# Altium PCB Sem 2 Lab Project - Simple Voice Recorder - Finalized Doc.PcbDoc
Units mm, origin at the board's own origin, x right, y up, seen from the top; angles counter-clockwise.
Board outline 92.5 x 147.5 mm, 2 copper layers (Top Layer, Bottom Layer); 23 components, 24 nets, 113 pads, 3 vias.
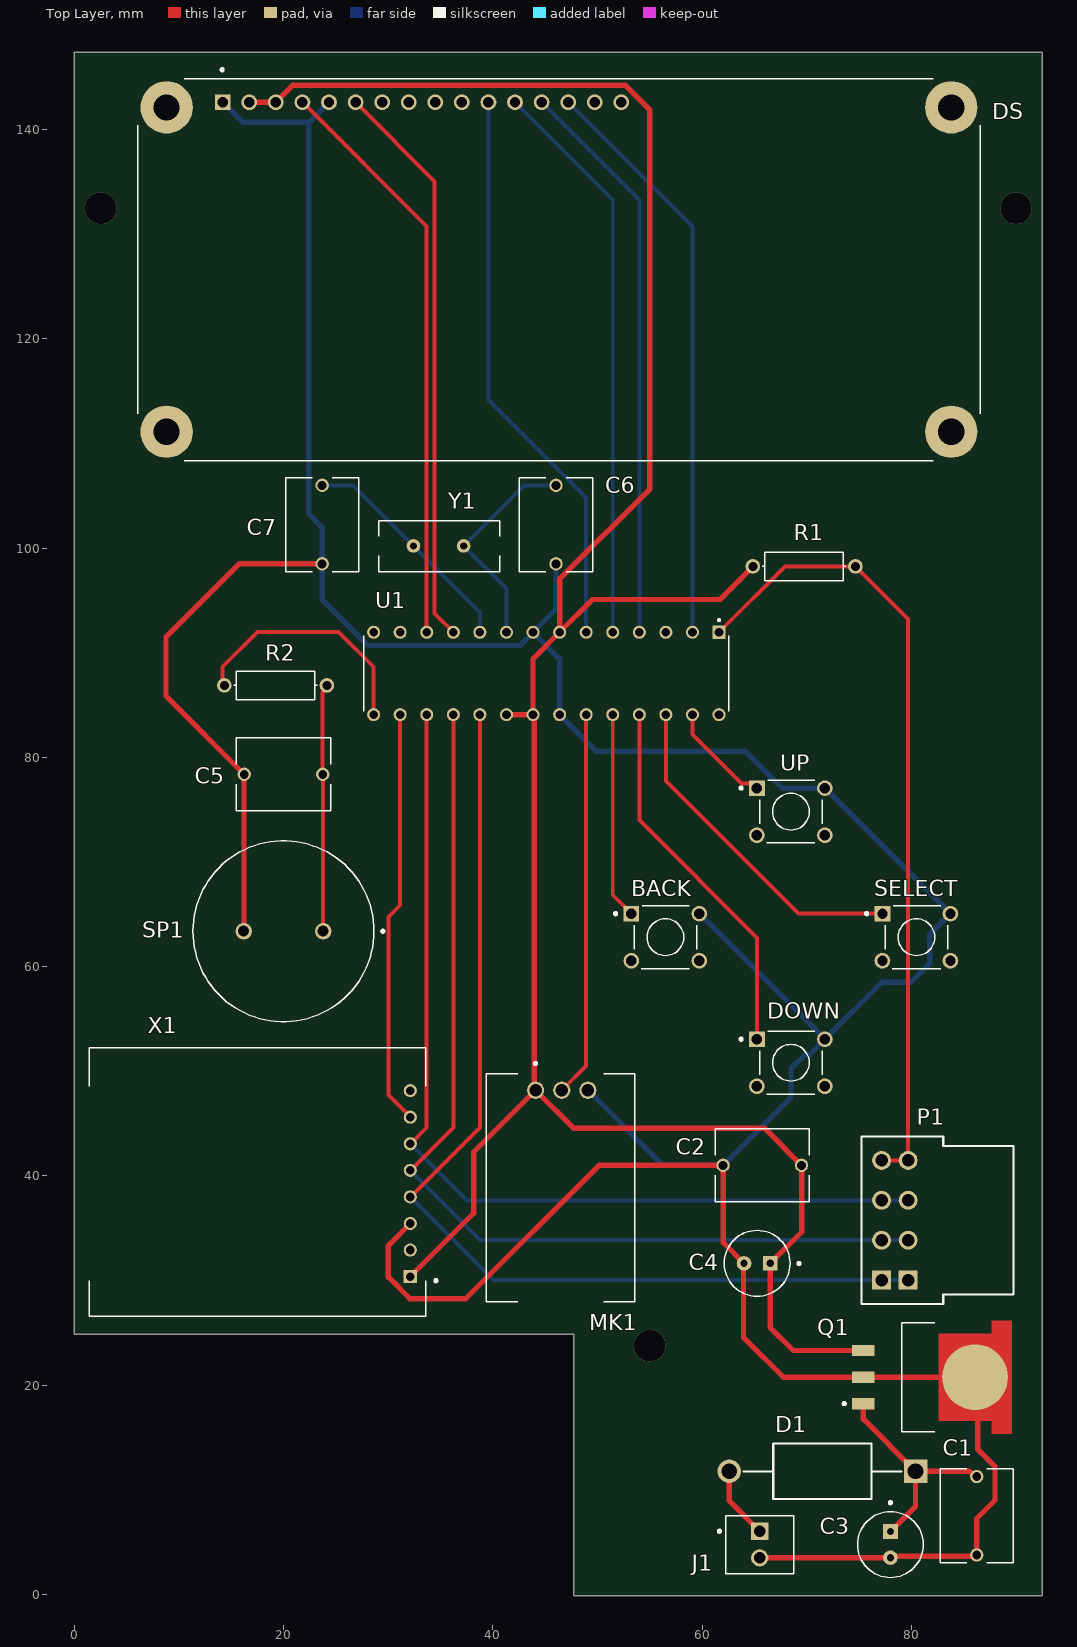
[diagram p0: Top Layer view]
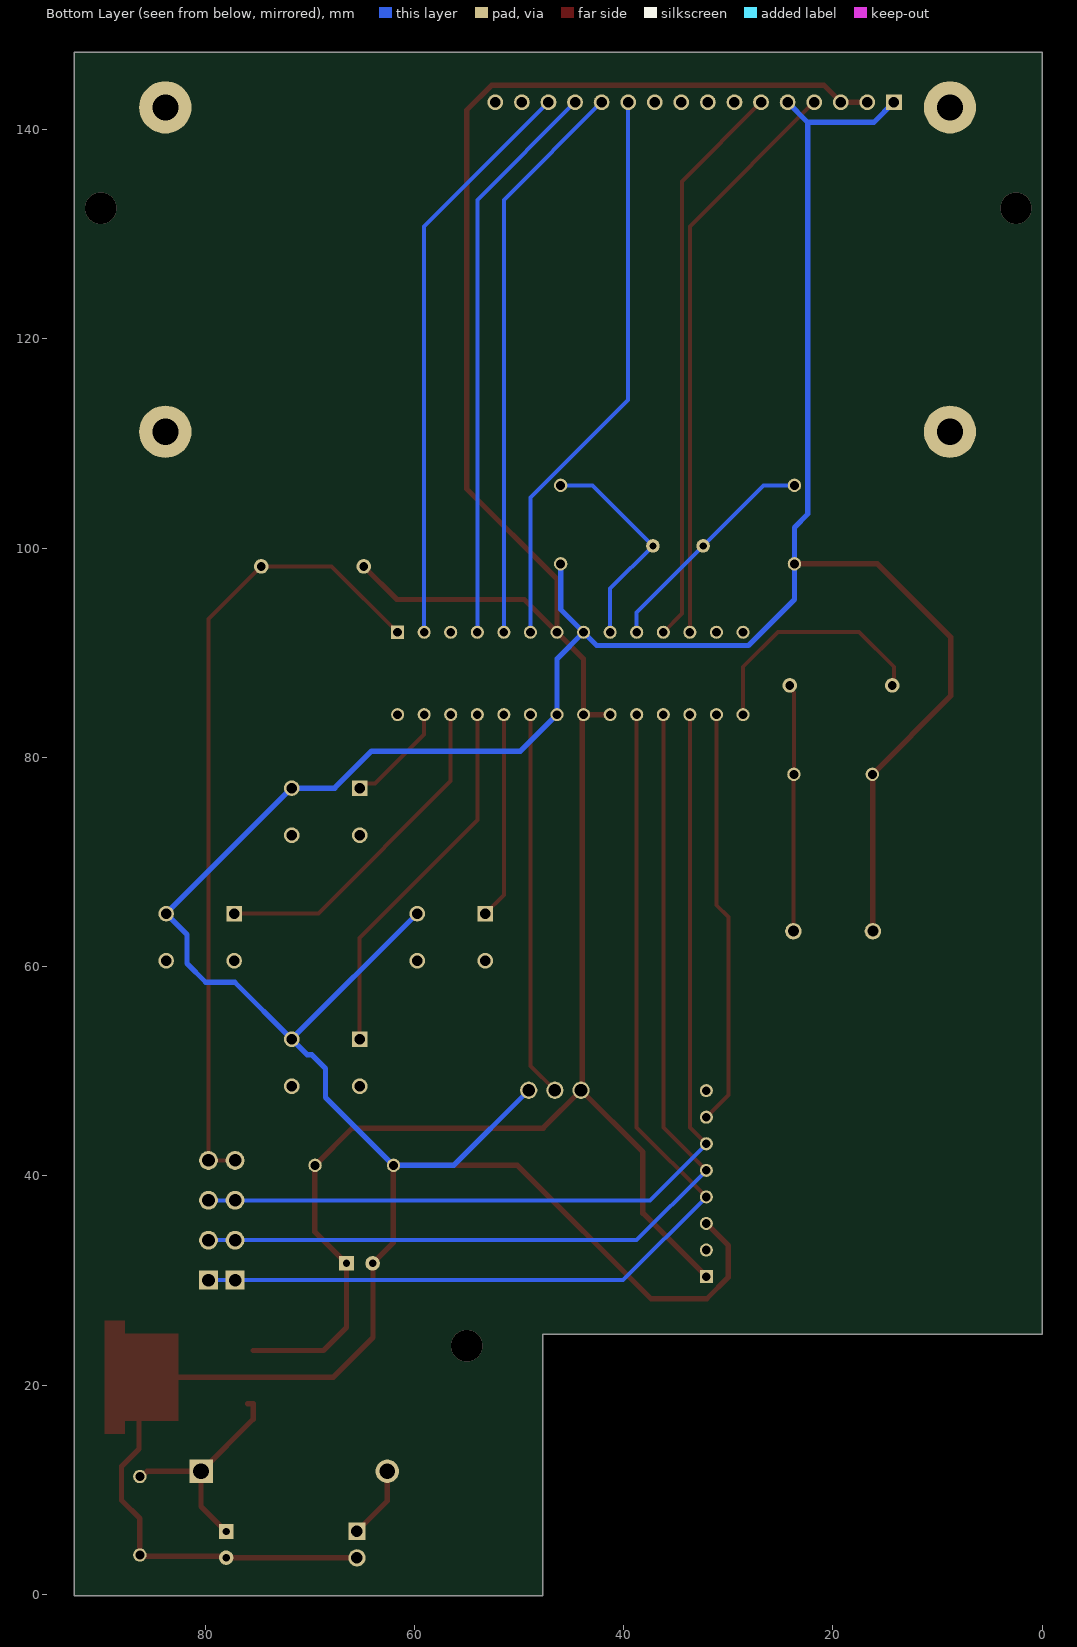
[diagram p1: Bottom Layer view, seen from below]
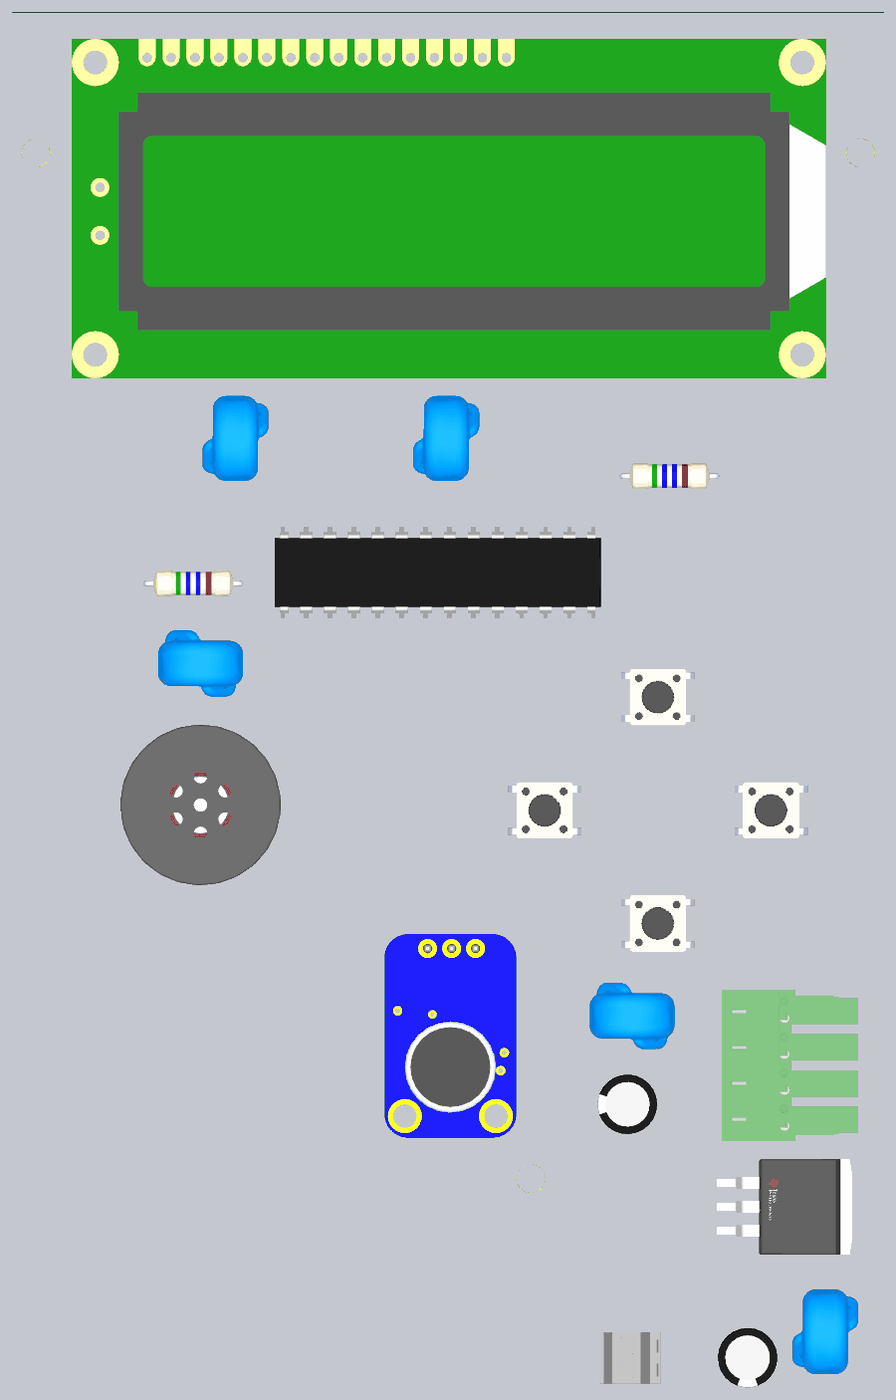
[diagram p2: 3D render of the assembled board from above, using the file's embedded part models]

## Layer stack, top to bottom
Top Solder: solder mask 0.0102, Solder Resist, Dk 3.5
Top Layer: signal copper 0.0356
Dielectric 1: dielectric 0.32, FR-4, Dk 4.8
Bottom Layer: signal copper 0.0356
Bottom Solder: solder mask 0.0102, Solder Resist, Dk 3.5

## Board outline
47.729,-0.124 47.729,24.876 0,24.876 0,147.376 92.5,147.376 92.5,-0.124

## Design rules (kind name [scope] priority, off if disabled: settings)
Clearance [All] p1: gap=0.381 ignorepadtopadclearanceinfootprint=FALSE except(0.508: Arc-Hole Track-Hole SMDPad-Hole THPad-Hole Via-Hole Fill-Hole Poly-Hole Region-Hole Text-Hole)
PolygonConnect [All] p1: connectstyle=Relief reliefconductorwidth=0.254 reliefentries=4 polygonreliefangle="90 Angle" airgapwidth=0.254
RoutingVias [All] p1: holewidth=0.711 width=1.27 viastyle="Through Hole" minholewidth=0.711 minwidth=1.27 maxholewidth=0.711 maxwidth=1.27
SilkToSolderMaskClearance [IsPad] p1: minsilkscreentomaskgap=0.127 clearancetoexposedcopper=TRUE
SolderMaskExpansion [All] p1: expansion=0.102 istentingtop=FALSE
Width Width_1 [InNet('+5V0') or InNet('GND') or InNet('NetC1_2') or InNet('VCC')] p1: maxlimit=0.635 minlimit=0.381 preferedwidth=0.508
Width [All] p2: maxlimit=0.508 minlimit=0.254 preferedwidth=0.381
29 further rules are at their usual default settings.

## Components (designator, comment, footprint, x,y, rotation, side; value= is the part's Value field where it differs from the comment)
BACK "Push Button" 1825910-6 56.472,62.806 r0 top
C1 "0.1 uF" DE6E3KJ222MN3A 86.25,7.5 r90 top
C2 "0.1 uF" DE6E3KJ222MN3A 65.75,41 r0 top
C3 "0.22 uF" CAPPRD500W60D1000H1600-V-000-300 78,4.75 r270 top
C4 "10 uF" CAPPRD500W60D1000H1600-V-000-300 65.252,31.626 r180 top
C5 "0.22 uF" DE6E3KJ222MN3A 19.979,78.376 r0 top
C6 "22 pF" DE6E3KJ222MN3A 46.029,102.244 r90 top
C7 "22 pF" DE6E3KJ222MN3A 23.679,102.244 r90 top
D1 "1N5822" 1N5822 71.5,11.75 r180 top
DOWN "Push Button" 1825910-6 68.472,50.806 r0 top
DS "RC1602B-BIW-CSV" RC1602B-BIW-CSV 46.311,126.622 r0 top
J1 "1546215-2" 1546215-2 65.5,4.75 r270 top
MK1 "Microphone" "Adafruit Max4466" 46.479,38.876 r270 top
P1 "691309310004" 691309310004 82.5,35.75 r90 top
Q1 "LM7805CT/NOPB" LM7805SX/NOPB 80.75,20.75 r90 top
R1 "10K" RESAD800W55L650D230-100-300_SEI_CF14_CFM12 69.75,98.25 r270 top
R2 "150 Ohm" RESAD800W55L650D230-100-300_SEI_CF14_CFM12 19.229,86.876 r270 top
SELECT "Push Button" 1825910-6 80.472,62.806 r0 top
SP1 "Speaker" AST-01708MR-R 19.979,63.376 r180 top
U1 "ATMEGA328-PU" ATMEGA328-PU 45.104,88.018 r270 top
UP "Push Button" 1825910-6 68.472,74.806 r0 top
X1 "MSDBB" "Micro SD Card Breakout Board" 17.75,39.25 r0 top
Y1 "830003240B" 830003240B 34.804,100.206 r270 top

## Footprints (in the part's own frame and the unit in brackets; to place one, negate y for a bottom-side part, rotate by r counter-clockwise, add the part's x,y. Pads: shape width x height; smd on the part's side, far side on the other; paste and mask are expansions set on the pad)
1N5822 [mm] "Low Drop Power Schottky Rectifier, 40V VRRM"
  round 2.25 hole 1.5: A(8.9,0)
  rect 2.25x2.25 hole 1.5: C(-8.9,0)
  silkscreen extent -7.55,-2.65 7.55,2.65, body extent -9.49,-2.51 9.49,2.51, height 5.51
1546215-2 [mm] "TERMI-BLOK PCB MOUNT, 90 2P"
  rect 1.65x1.65 hole 1.1: 1(-1.27,0)
  round 1.65 hole 1.1: 2(1.27,0)
  silkscreen extent -2.77,-3.97 2.77,3.25, body extent -2.72,-3.25 2.73,3.25, height 10
1825910-6 [mm] "push button"
  rect 1.498x1.498 hole 0.99: 1(-3.237,2.25)
  round 1.498 hole 0.99: 2(3.263,2.25) 3(-3.237,-2.25) 4(3.263,-2.25)
  silkscreen extent -4.87,-3 3.01,3, body extent -3.88,-2.99 3.91,3, height 5.01
830003240B [mm]
  round 1.3 hole 0.7: 1(0,2.4) 2(0,-2.4)
  silkscreen extent -2.41,-5.74 2.46,5.84, body extent -2.3,-5.62 2.35,5.73, height 4.5
691309310004 [mm] "Horizontal Reserved PCB Header, pitch 3.81mm, 04p"
  rect 1.8x1.8 hole 1.2: 1(-5.715,2.81) 1(-5.715,5.35)
  round 1.8 hole 1.2: 2(-1.905,5.35) 2(-1.905,2.81) 3(1.905,5.35) 3(1.905,2.81) 4(5.715,2.81) 4(5.715,5.35)
  silkscreen extent -8.02,-7.25 8.02,7.25, body extent -8.02,-7.25 8.02,7.25, height 6.85
"Adafruit Max4466" [mm] "microphone module"
  round 1.65 hole 1.2: 1(-9.3,-2.4) 2(-9.3,0.1) 3(-9.3,2.6)
  silkscreen extent -11.97,-7.1 10.9,7.1, body extent -10.8,-6.98 10.79,6.99, height 8.9
AST-01708MR-R [mm] "SPEAKER .2W 8 OHM 1500HZ 87DBA MYLAR"
  round 1.575 hole 1.05: 1(-3.8,0) 2(3.8,0)
  silkscreen extent -9.62,-8.65 8.65,8.65, body extent -8.5,-8.5 8.5,8.5, height 8
ATMEGA328-PU [mm] "AVR AVRÂ® ATmega Microcontroller IC 8-Bit 20MHz 32KB (16K x 16) FLASH 28-PDIP"
  rect 1.25x1.25 hole 0.83: 1(-3.937,16.51)
  round 1.25 hole 0.83: 2(-3.937,13.97) 3(-3.937,11.43) 4(-3.937,8.89) 5(-3.937,6.35) 6(-3.937,3.81) 7(-3.937,1.27) 8(-3.937,-1.27) 9(-3.937,-3.81) 10(-3.937,-6.35) 11(-3.937,-8.89) 12(-3.937,-11.43) 13(-3.937,-13.97) 14(-3.937,-16.51) 15(3.937,-16.51) 16(3.937,-13.97) 17(3.937,-11.43) 18(3.937,-8.89) 19(3.937,-6.35) 20(3.937,-3.81) 21(3.937,-1.27) 22(3.937,1.27) 23(3.937,3.81) 24(3.937,6.35) 25(3.937,8.89) 26(3.937,11.43) 27(3.937,13.97) 28(3.937,16.51)
  silkscreen extent -5.2,-17.45 3.62,17.45, body extent -4.84,-17.26 4.84,17.34, height 4
CAPPRD500W60D1000H1600-V-000-300 [mm] "Through Hole Capacitor, Polarized Radial Diameter"
  rect 1.4x1.4 hole 0.7: 1(-1.25,0)
  round 1.4 hole 0.7: 2(1.25,0)
  silkscreen extent -4.12,-3.15 3.15,3.15, body extent -3.15,-3.15 3.15,3.15, height 5
DE6E3KJ222MN3A [mm] "non-polarized,  Lead Type Disc Ceramic Capacitor"
  round 1.28 hole 0.85: 1(-3.75,0) 2(3.75,0)
  silkscreen extent -4.5,-3.5 4.5,3.5, body extent -4.5,-3.5 4.5,3.5, height 12
LM7805SX/NOPB [mm] "1.5-A, 30-V, linear voltage regulator 3-DDPAK/TO-263 0 to 125"
  rect 1.07x2.16 smd paste+0 mask+0: 1(-2.54,5.338) 2(0,5.338) 3(2.54,5.338)
  round 6.291 smd paste+0 mask+0: 2(0,-5.338)
  Top Layer region: -5.4,-8.832 5.4,-8.832 5.4,-6.922 4.165,-6.922 4.165,-1.842 -4.165,-1.842 -4.165,-6.922 -5.4,-6.922 -5.4,-8.832
  silkscreen extent -5.2,-1.47 5.21,7.28, body extent -5.08,-8.39 5.08,5.99, height 4.79
"Micro SD Card Breakout Board" [mm]
  rect 1.25x1.25 hole 0.83: 1(14.351,-8.89)
  round 1.25 hole 0.83: 2(14.351,-6.35) 3(14.351,-3.81) 4(14.351,-1.27) 5(14.351,1.27) 6(14.351,3.81) 7(14.351,6.35) 8(14.351,8.89)
  silkscreen extent -16.32,-12.7 16.93,13, body extent -21.06,-12.55 15.61,12.85, height 2.6
RC1602B-BIW-CSV [mm] "Display: LCD; alphanumeric; STN Negative; 16x2; blue; LED; PIN: 16"
  rect 1.508x1.508 hole 1: 1(-32.14,16)
  round 1.508 hole 1: 2(-29.6,16) 3(-27.06,16) 4(-24.52,16) 5(-21.98,16) 6(-19.44,16) 7(-16.9,16) 8(-14.36,16) 9(-11.82,16) 10(-9.28,16) 11(-6.74,16) 12(-4.2,16) 13(-1.66,16) 14(0.88,16) 15(3.42,16) 16(5.96,16)
  round 5 hole 2.5: S1(-37.5,15.5) S2(37.5,15.5) S3(37.5,-15.5) S4(-37.5,-15.5)
  silkscreen extent -40.25,-18.25 40.25,19.22, body extent -40,-18 40,18, height 13.5
RESAD800W55L650D230-100-300_SEI_CF14_CFM12 [mm] "Through Hole Resistor"
  round 1.4 hole 0.85: 1(0,4.9) 2(0,-4.9)
  silkscreen extent -1.35,-4 1.35,4, body extent -1.35,-5.31 1.35,5.25, height 3.7

## Part data
C1 C2 C5 C6 C7: library part "Non-polarized Cap", "Non-polarized Cap"
C3 C4: library part "Polarized Cap", "Through Hole Capacitor, Polarized Radial Diameter"
D1: library part "Schottky Diode", "Diode Schottky 40V 3A Through Hole", ComponentLink1Description=Datasheet, ComponentLink1URL=https://www.snapeda.com/parts/1N5822/ON%20Semiconductor/datasheet/
DS: "Display: LCD; alphanumeric; STN Negative; 16x2; blue; LED; PIN: 16", ComponentLink1Description=Datasheet, ComponentLink1URL=https://datasheetspdf.com/pdf/1111074/Raystar/RC1602B-BIW-CSV/1
J1: library part "Connection Terminal", "TERMI-BLOK PCB MOUNT, 90 2P", ComponentLink1Description=Datasheet, ComponentLink1URL=https://www.snapeda.com/parts/1546215-2/TE%20Connectivity/datasheet/
P1: library part CMP-1502-01849-1, "Serie 3093 - 3.81mm Horizontal Reversed PCB Header WR-TBL, 4 pin", Manufacturer="Wurth Elektronik", Operating Temperature=-40to115degC, Datasheet URL=http://katalog.we-online.de/em/datasheet/6913093100xx.pdf, Gender=Female, Manufacturer URL=http://www.we-online.de, Mounting Technology=THT, Package Reference=691309310004, Packaging=Box, Part Number=691309310004, Pin Number=4, Pitch=3.81mm, Publisher=WurthElektronik
Q1: library part "Voltage Regulator", "1.5-A, 30-V, linear voltage regulator 3-TO-220 0 to 125", ComponentLink1Description=Datasheet, ComponentLink1URL=https://www.snapeda.com/parts/LM7805CT/NOPB/Texas%20Instruments/datasheet/
R1 R2: library part Resistor, "Resistor"
SP1: Manufacturer="PUI Audio Inc.", Power Rating="0.2 W", ComponentLink1Description=Datasheet, ComponentLink1URL=https://www.snapeda.com/parts/AST-01708MR-R/PUI%20Audio/datasheet/, Impedance="8 Ohm", Sensitivity="90 dB"
U1: "AVR AVRÂ® ATmega Microcontroller IC 8-Bit 20MHz 32KB (16K x 16) FLASH 28-PDIP", Manufacturer="Microchip Technology Inc.", Package=DIP-28, ComponentLink1Description=Datasheet, ComponentLink1URL=https://ww1.microchip.com/downloads/en/DeviceDoc/ATmega48A-PA-88A-PA-168A-PA-328-P-DS-DS40002061B.pdf
X1: library part "Micro SD Card Breakout Board", "Micro SD Card Breakout Board", Manufacturer="Adafruit Industries", ComponentLink1Description=Datasheet, ComponentLink2Description=Tutorial, ComponentLink2URL=https://learn.adafruit.com/adafruit-micro-sd-breakout-board-card-tutorial
Y1: "Crystal Oscillator", Frequency=16MHz, ComponentLink1Description=Datasheet, ComponentLink1URL=https://www.mouser.com/datasheet/2/445/830003240B-2005173.pdf
BACK DOWN SELECT UP: ComponentLink1Description=Datasheet, ComponentLink1URL=https://www.snapeda.com/parts/1825910-6/TE%20Connectivity/datasheet/
MK1: Reference=https://www.adafruit.com/product/1063

## Via types
v1: diameter 3, hole 3, Top Layer to Bottom Layer, 3 vias

## Nets (pads, with @x,y where several pads share a name; then routed paths per layer and width w, separated by ;. In a path a pad name is that pad's centre, name@x,y a point inside that pad or via, vN(x,y) a via of type N, cw(c..) or ccw(c..) an arc to the next point about the centre after c; other vN are vias at no path point)
+5V0: C2.2 C4.1 DS.2 DS.3 MK1.1 Q1.3 R1.2 U1.7 U1.20 U1.21 X1.1 | length 239.7
  Top Layer w0.508: DS.2 DS.3 20.879,144.25 52.607,144.25 55,141.857 55,105.662 46.374,97.036 U1.7 ; X1.1 38.166,36.425 38.166,42.263 MK1.1 ; U1.20 U1.21 ; R1.2 61.688,95.088 49.507,95.088 U1.7 ; Q1.3 68.71,23.29 66.502,25.498 C4.1 69.521,34.645 69.521,40.979 C2.2 65.947,44.553 47.702,44.553 MK1.1 ; U1.21 43.834,89.415 U1.7 ; U1.21 43.957,83.958 43.957,48.298 MK1.1
GND: BACK.2 C1.1 C2.1 C3.2 C4.2 C5.1 C6.1 C7.1 DOWN.2 DS.1 DS.5 J1.2 MK1.3 Q1.2 SELECT.2 SP1.2 U1.8 U1.22 UP.2 X1.3 | length 383.4
  Top Layer w0.508: SP1.2 16.204,63.401 16.204,78.351 C5.1 8.75,85.855 8.75,91.5 15.744,98.494 C7.1 ; X1.3 30,33.339 30,30.313 32.063,28.25 37.396,28.25 50.146,41 C2.1 62.021,40.979 62.021,33.607 C4.2 63.96,31.584 63.96,24.54 67.75,20.75 75.413,20.75 86.088,20.75 86.338,20.5 86.338,13.886 88,12.224 88,8.981 86.25,7.231 C1.1 86.125,3.625 78.125,3.625 C3.2 77.99,3.49 65.51,3.49 J1.2
  Bottom Layer w0.508: DS.1 16.098,140.695 22.404,140.695 ; DS.5 22.404,140.695 ; C6.1 46.029,94.15 U1.8 ; MK1.3 56.255,41 C2.1 68.5,47.5 68.5,50.25 69.808,51.558 70.237,51.558 DOWN.2 ; BACK.2 DOWN.2 ; 22.404,140.695 22.404,103.25 23.679,101.975 C7.1 23.679,95.088 28.072,90.695 42.574,90.695 U1.8 ; U1.8 46.374,89.415 U1.22 49.863,80.592 64.094,80.592 67.631,77.056 UP.2 SELECT.2 81.749,63.07 81.749,60.296 79.952,58.5 77.179,58.5 DOWN.2
NetBACK_1: BACK.1 U1.24 | length 19.8
  Top Layer w0.381: U1.24 51.454,66.837 BACK.1
NetC1_2: C1.2 C3.1 D1.C Q1.1 | length 21.9
  Top Layer w0.508: Q1.1@75.958,18.21 Q1.1 75.413,16.737 D1.C ; C3.1 80.4,8.4 D1.C ; C1.2 86.041,11.25 85.541,11.75 D1.C
NetC5_2: C5.2 R2.1 SP1.1 | length 23.7
  Top Layer w0.381: SP1.1 23.754,63.401 23.754,78.351 C5.2 23.729,86.2 24.129,86.6 R2.1
NetDOWN_1: DOWN.1 U1.25 | length 35.7
  Top Layer w0.381: U1.25 53.994,74.006 65.25,62.75 65.25,53.071 DOWN.1
NetDS_4: DS.4 U1.12 | length 55.6
  Top Layer w0.381: DS.4 33.674,130.739 U1.12
NetDS_6: DS.6 U1.11 | length 54.5
  Top Layer w0.381: DS.6 34.436,135.057 34.436,93.733 U1.11
NetDS_11: DS.11 U1.6 | length 54.5
  Bottom Layer w0.381: DS.11 39.571,114.165 48.914,104.822 U1.6
NetDS_12: DS.12 U1.5 | length 54.5
  Bottom Layer w0.381: DS.12 51.454,133.279 U1.5
NetDS_13: DS.13 U1.4 | length 54.5
  Bottom Layer w0.381: DS.13 53.994,133.279 U1.4
NetDS_14: DS.14 U1.2 | length 55.6
  Bottom Layer w0.381: DS.14 59.074,130.739 U1.2
NetSELECT_1: SELECT.1 U1.26 | length 32.3
  Top Layer w0.381: U1.26 56.534,77.716 69.194,65.056 SELECT.1
NetU1_16: U1.16 X1.7 | length 39.9
  Top Layer w0.381: U1.16@31.134,83.939 31.134,65.86 30,64.726 30,47.701 X1.7 ; U1.16 U1.16@31.277,83.939
NetU1_27: U1.27 UP.1 | length 10.2
  Top Layer w0.381: U1.27 59.074,82.176 63.75,77.5 64.791,77.5 UP.1
PB1: R2.2 U1.15 | length 23.6
  Top Layer w0.381: R2.2 14.158,87.047 14.158,88.658 17.5,92 25.25,92 28.594,88.656 U1.15
PB3: P1.3 U1.17 X1.6 | length 91.5
  Top Layer w0.381: X1.6 33.674,44.633 U1.17
  Bottom Layer w0.381: X1.6 37.506,37.655 77.15,37.655 P1.3@79.69,37.655
PB4: P1.2 U1.18 X1.5 | length 95.6
  Top Layer w0.381: X1.5 36.214,44.633 U1.18
  Bottom Layer w0.381: X1.5 38.776,33.845 77.15,33.845 P1.2@79.69,33.845
PB5: P1.1 U1.19 X1.4 | length 99.7
  Top Layer w0.381: X1.4 38.754,44.633 U1.19
  Bottom Layer w0.381: X1.4 40.046,30.035 77.15,30.035 P1.1@79.69,30.035
PB6: C6.2 U1.9 Y1.1 | length 21.2
  Bottom Layer w0.381: U1.9 41.294,96.116 Y1.1 42.992,105.994 C6.2
PB7: C7.2 U1.10 Y1.2 | length 22
  Bottom Layer w0.381: C7.2 26.616,105.994 Y1.2 38.754,93.856 U1.10
PC0: MK1.2 U1.23 | length 36.9
  Top Layer w0.381: MK1.2 48.914,50.511 U1.23
PC6: P1.4 R1.1 U1.1 | length 77.1
  Top Layer w0.381: U1.1 67.909,98.25 R1.1 79.69,93.21 79.69,41.465 P1.4@77.15,41.465
VCC: D1.A J1.1 | length 6.9
  Top Layer w0.508: D1.A 62.6,8.92 J1.1
pads on no net: BACK.3 BACK.4 DOWN.3 DOWN.4 DS.7 DS.8 DS.9 DS.10 DS.15 DS.16 DS.S1 DS.S2 DS.S3 DS.S4 SELECT.3 SELECT.4 U1.3 U1.13 U1.14 U1.28 UP.3 UP.4 X1.2 X1.8
copper on no net:
  other v1: 55,23.75 2.5,132.5 90,132.5

## Silkscreen, mask and mechanical layers (free items; w line width, h text height)
Outline:
  lines w0.05: 0,25 47.75,25 47.75,0 92.5,0 92.5,147.5 0,147.5 0,25